# Altium PCB Send_Medicine_Motor.PcbDoc (part 5 of 5)
Units mm, origin at the board's own origin, x right, y up, seen from the top; angles counter-clockwise.
Board outline 150.04 x 100.2 mm, 2 copper layers (Top Layer, Bottom Layer); 273 components, 158 nets, 892 pads, 508 vias.
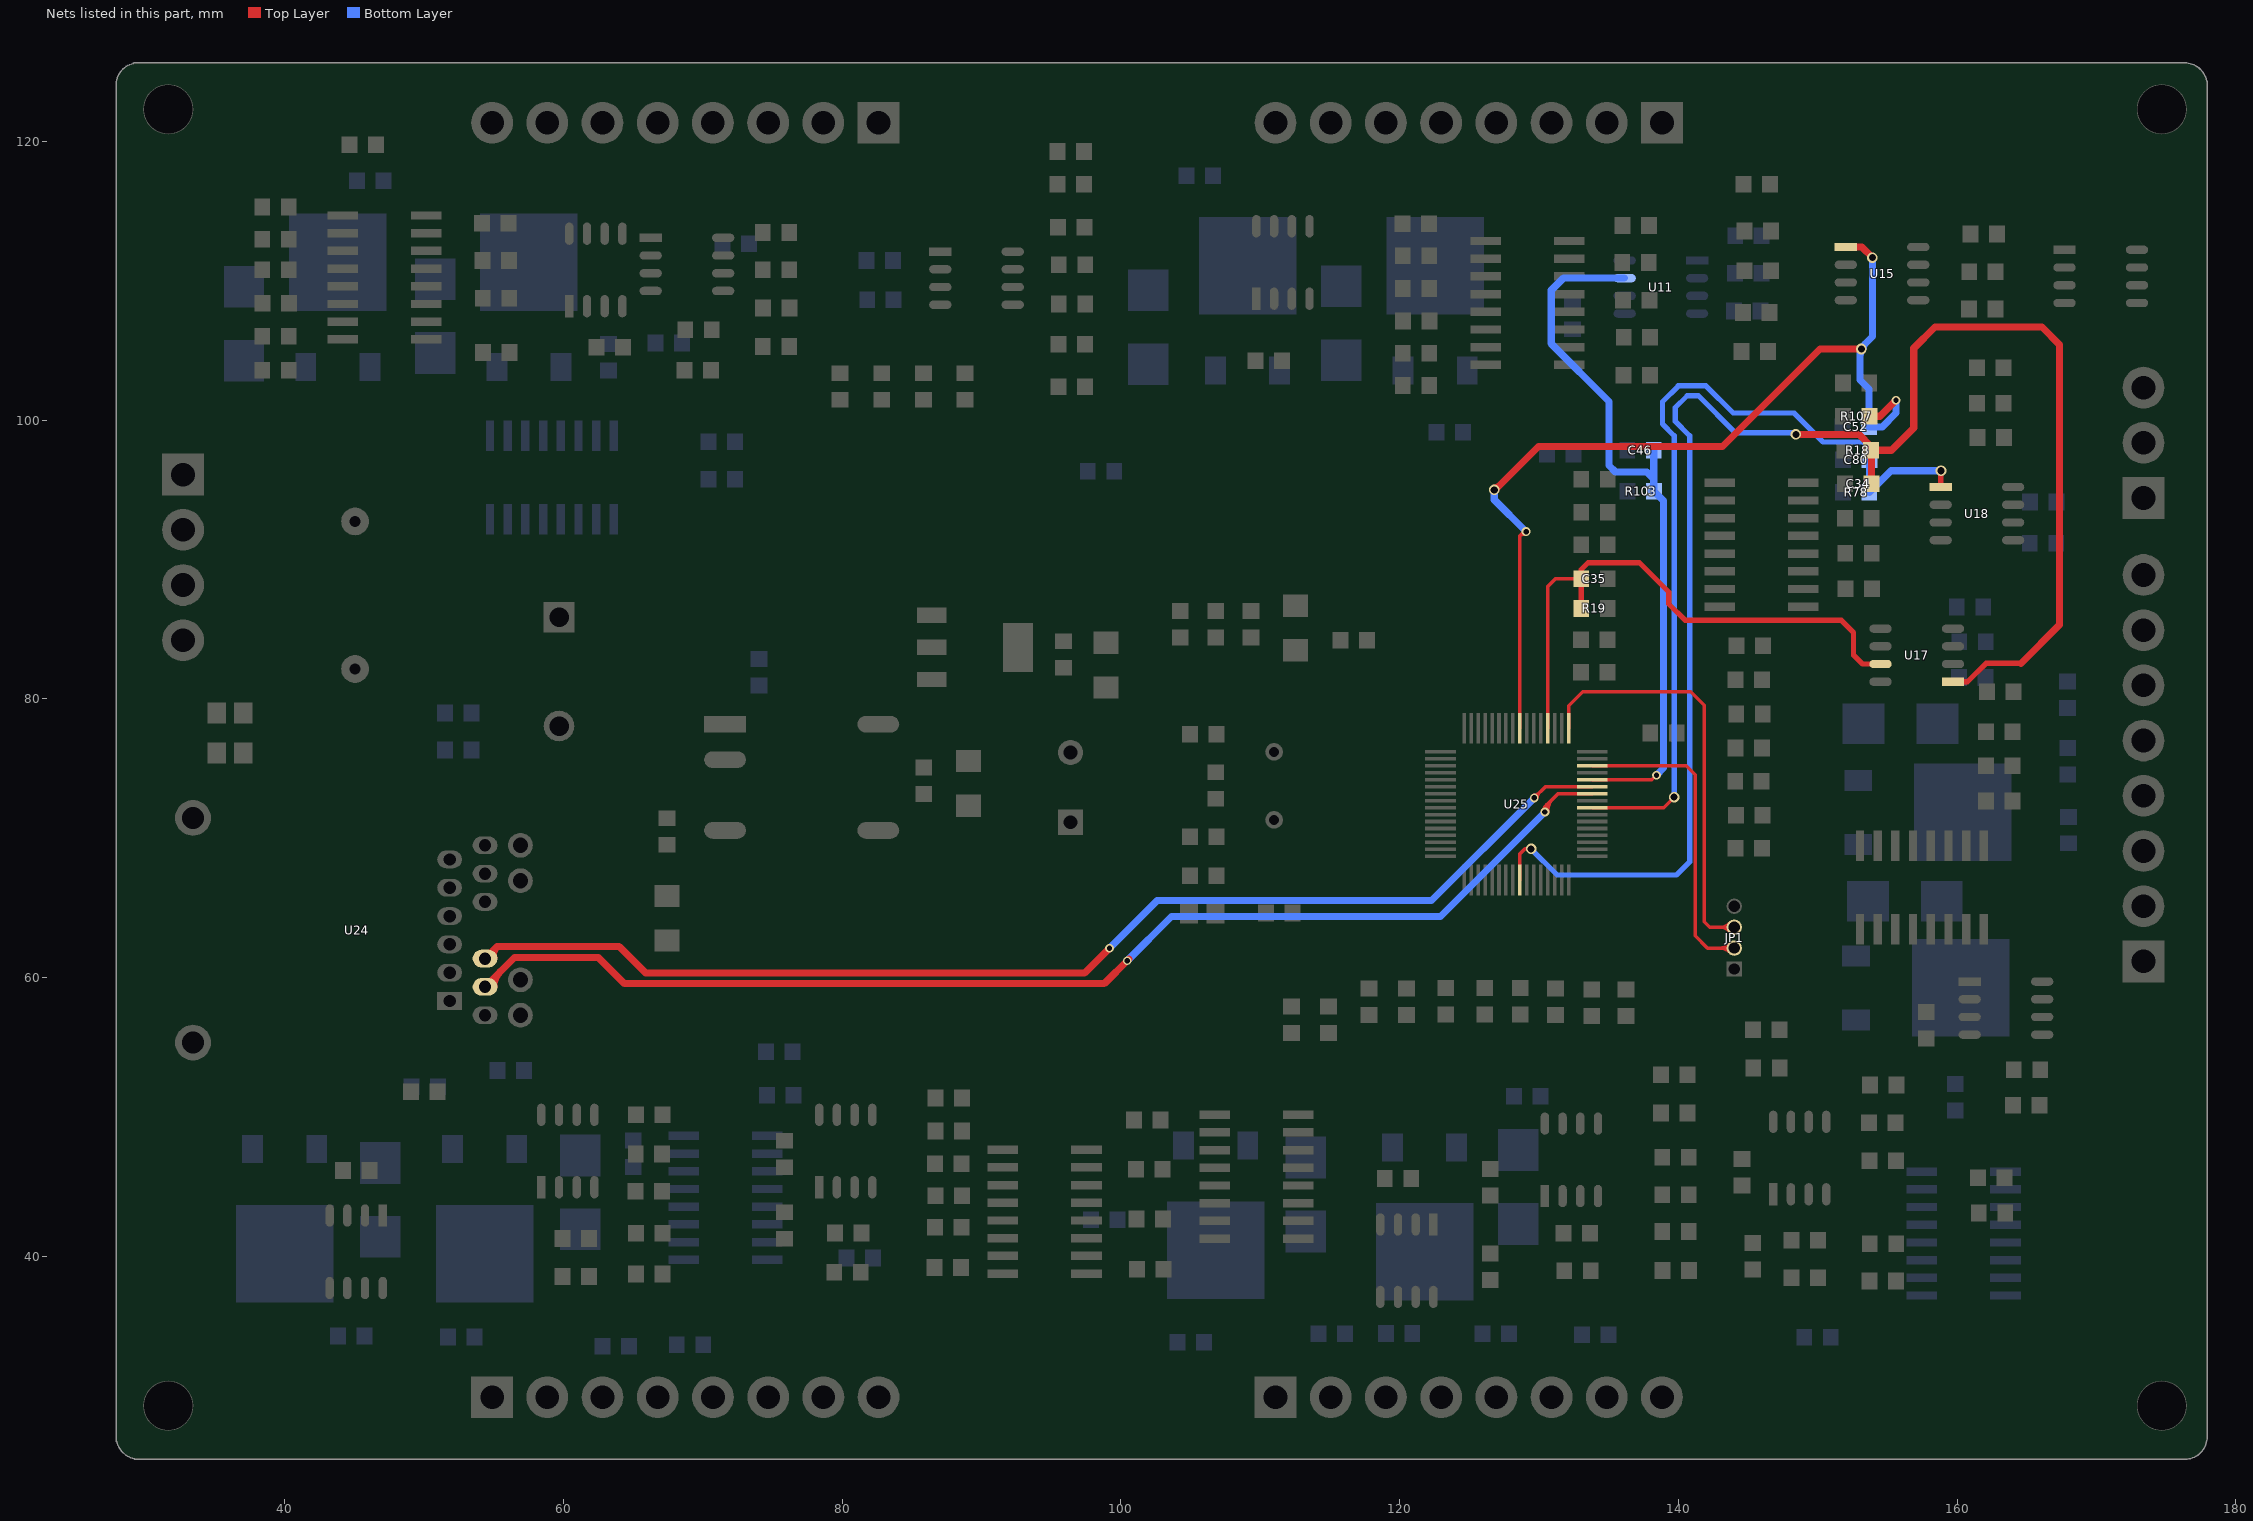
[diagram p5: the nets of this part, all layers, seen from the top]

## Via types
v1: diameter 0.762, hole 0.508, Top Layer to Bottom Layer, 415 vias
v2: diameter 1.27, hole 0.762, Top Layer to Bottom Layer, 47 vias
v3: diameter 0.635, hole 0.381, Top Layer to Bottom Layer, 43 vias
v4: diameter 3.4, hole 3.4, Top Layer to Bottom Layer, 2 vias
v5: diameter 0.6, hole 0.3, Top Layer to Bottom Layer, 1 vias

## Nets (pads, with @x,y where several pads share a name; then routed paths per layer and width w, separated by ;. In a path a pad name is that pad's centre, name@x,y a point inside that pad or via, vN(x,y) a via of type N, cw(c..) or ccw(c..) an arc to the next point about the centre after c; other vN are vias at no path point) (continued)
SOUT42: C46.2 R103.2 U11.7 U25.44 | length 52.1
  Top Layer w0.254: U25.44@133.836,74.2 138.106,74.2 v3(138.43,74.524)
  Bottom Layer w0.508: U11.7@136.151,110.185 131.75,110.185 130.886,109.322 130.886,105.486 135.026,101.346 135.026,96.749 135.509,96.266 137.754,96.266 138.237,95.783 ; C46.2@138.237,97.841 138.237,95.783 ; v3(138.43,74.524) 138.938,75.032 138.938,94.219 R103.2@138.262,94.894 138.237,94.92 138.237,95.783
SOUT43: C52.2 R107.2 U15.1 U25.56 | length 71.2
  Top Layer w0.254: U25.56@128.636,77.9 128.636,91.704 ; v3@129.036,91.814 ccw(c128.932,91.408) 128.636,91.704 ; v3(129.083,91.999) 128.93,91.999 128.636,91.704
  Top Layer w0.508: v1(126.797,94.996) 126.848,94.996 129.972,98.12 143.18,98.12 150.165,105.105 v1(153.137,105.105) ; v1@126.797,95.123 ccw(c126.797,95.552) 127.1,95.249 ; U15.1@152.019,112.42 153.162,112.42 v1(153.924,111.658) ; R107.2@153.731,100.279 154.483,100.279 v3(155.626,101.422)
  Bottom Layer w0.508: v1(126.797,94.996) 126.797,94.285 v3(129.083,91.999) ; 153.035,104.553 cw(c153.688,104.553) v1@153.226,105.015 ; v1@153.264,105.105 cw(c153.815,105.105) 153.425,105.495 ; v1(153.924,111.658) 153.924,105.994 153.035,105.105 153.035,102.87 153.68,102.225 C52.2@153.68,99.517 154.635,99.517 155.626,100.508 v3(155.626,101.422)
SOUT51: C34.2 R18.2 U17.1 U25.25 | length 117.5
  Top Layer w0.254: U25.25@128.636,67 128.636,68.87 129.007,69.24 v1(129.438,69.24)
  Top Layer w0.381: U17.1@159.715,81.229 160.757,81.229 162.077,82.55 164.592,82.55
  Top Layer w0.508: v1(148.438,98.984) 152.959,98.984 153.833,98.11 R18.2@153.833,97.841 ; C34.2@153.858,95.428 153.858,97.815 R18.2@153.833,97.841 ; 164.592,82.55 167.361,85.319 167.361,105.41 166.091,106.68 158.42,106.68 156.896,105.156 156.896,99.441 155.296,97.841 R18.2@153.833,97.841
  Bottom Layer w0.381: v1(129.438,69.24) 131.318,67.361 139.878,67.361 140.818,68.301 140.818,98.882 139.776,99.924 139.776,100.889 140.64,101.752 141.453,101.752 144.12,99.085 148.336,99.085 v1(148.438,98.984)
SOUT52: C35.2 R19.2 U17.7 U25.52 | length 41.7
  Top Layer w0.254: U25.52@130.636,77.9 130.636,88.066 131.191,88.621 C35.2@133.035,88.621
  Top Layer w0.381: R19.2@133.035,86.487 C35.2@133.035,88.621 133.035,89.271 133.528,89.764 137.211,89.764 139.319,87.655 139.319,86.817 140.487,85.649 151.689,85.649 152.578,84.76 152.578,83.134 153.213,82.499 U17.7@154.515,82.499
SOUT53: C80.2 R78.2 U18.1 U25.40 | length 62.3
  Top Layer w0.254: U25.40@133.836,72.2 138.951,72.2 v1(139.7,72.949) v1@139.751,73
  Top Layer w0.381: U18.1@158.826,95.199 158.826,96.342 v1(158.852,96.368)
  Bottom Layer w0.381: v1(139.7,72.949) 139.7,98.882 138.862,99.72 138.862,101.321 140.005,102.464 141.986,102.464 143.942,100.508 148.311,100.508 150.393,98.425 153.264,98.425 153.731,97.958 C80.2@153.731,97.155
  Bottom Layer w0.508: C80.2@153.706,97.155 R78.2@153.706,94.818 155.255,96.368 v1(158.852,96.368)
TCK/SWCLK: JP1.3 U25.49 | length 31.6
  Top Layer w0.254: U25.49@132.136,77.9 132.136,79.507 133.147,80.518 140.894,80.518 141.859,79.553 141.859,64.008 142.252,63.615 JP1.3@144.018,63.615 ; JP1.3@143.719,63.316 ccw(c142.997,62.594) 142.997,63.615 ccw(c142.997,64.636) JP1.3@143.719,63.914
TMS/SWDIO: JP1.2 U25.46 | length 24
  Top Layer w0.254: U25.46@133.836,75.2 140.573,75.2 141.224,74.549 141.224,62.992 142.101,62.115 JP1.2@144.018,62.115 ; JP1.2@143.719,61.816 ccw(c142.997,61.094) 142.997,62.115 ccw(c142.997,63.136) JP1.2@143.719,62.414
USAR1_RXD: U24.9 U25.43 | length 87.7
  Top Layer w0.254: v3(129.667,72.898) 130.469,73.7 U25.43@133.836,73.7 ; v3@129.667,73.088 ccw(c129.667,73.548) 129.992,73.223 ccw(c130.317,72.898) v3@129.857,72.898
  Top Layer w0.508: U24.9@54.381,61.366 55.245,62.23 ; U24.9@55.009,61.443 cw(c55.858,61.617) 55.245,62.23 ; v3(99.187,62.103) 97.409,60.325 65.913,60.325 64.008,62.23 55.245,62.23
  Bottom Layer w0.508: v3(99.187,62.103) 102.616,65.532 122.301,65.532 v3(129.667,72.898)
USAR1_TXD: U24.8 U25.42 | length 90.6
  Top Layer w0.254: v3@130.315,72.034 ccw(c130.143,72.263) 130.429,72.263 ; v3@130.365,71.882 cw(c131.132,71.882) 130.59,72.424 ; v3(130.429,71.882) 130.429,72.263 ; v3@130.543,72.034 cw(c130.715,72.263) 130.429,72.263 ; v3@130.619,71.882 cw(c131.999,71.882) 131.024,72.858 ; U25.42@133.836,73.2 131.366,73.2 130.429,72.263
  Top Layer w0.508: U24.8@54.381,59.334 56.49,61.443 62.509,61.443 64.389,59.563 98.806,59.563 v3@100.584,61.341 ; U24.8@55.016,59.334 cw(c56.549,59.334) 55.465,60.418
  Bottom Layer w0.508: v3(100.457,61.214) 103.632,64.389 122.936,64.389 v3(130.429,71.882)
pads on no net: Pad1.1 Pad2.1 Pad3.1 Pad4.1 U21.8 U24.1 U24.2 U24.3 U24.5 U24.6 U24.17 U25.1 U25.2 U25.3 U25.4 U25.14 U25.17 U25.20 U25.45 U25.50 U25.59 U25.61 U25.62
copper on no net: | length 0.8
  Top Layer w0.508: 65.913,46.101 66.675,46.101
  other v2: 102.311,60.3 104.013,62.052
  other v4: 36.601,57.048 36.601,69.748

## Polygon pours and split planes (outlines as drawn)
24V0 on Top Layer "Top Layer-No Net" (hatched 90Degree grid 0.508 track 0.305, remove dead copper, pour order 5): 28.296,74.701 28.296,112.954 29.032,112.954 36.703,120.625 41.605,125.527 41.859,125.527 163.83,125.527 171.171,118.186 177.317,112.039 177.317,107.34 177.317,39.421 173.609,35.712 163.855,25.959 163.855,25.679 42.418,25.679 40.691,27.407 39.065,29.032 39.065,37.16 39.065,41.224 47.752,49.911 49.479,51.638 153.187,51.638 153.187,102.718 150.571,105.334 147.422,102.184 78.308,102.184 78.308,80.289 74.422,76.403 73.254,75.235 28.118,75.235
GND on Top Layer "Top Layer-No Net" (hatched 90Degree grid 0.508 track 0.305, remove dead copper, pour order 6): 28.702,74.016 73.772,74.016 76.972,77.216 81.001,81.244 81.001,113.767 163.369,113.767 164.359,112.776 165.379,111.756 165.379,37.897 28.448,37.897 28.346,37.998 28.118,38.227 28.118,71.831
24V0 on Bottom Layer "Top Layer-No Net" (hatched 90Degree grid 0.508 track 0.305, remove dead copper, pour order 7): 28.296,75.768 28.296,113.386 28.397,113.487 27.864,112.954 27.864,112.497 28.677,112.497 33.909,117.729 41.427,125.247 43.942,125.247 163.576,125.247 165.202,123.622 177.063,111.76 177.063,110.693 177.063,39.243 177.419,38.887 164.846,26.314 164.389,26.314 42.418,26.314 41.961,26.772 39.167,29.566 39.167,41.224 39.243,41.224 49.733,51.714 49.809,51.638 152.552,51.638 152.552,102.083 153.365,102.895 152.375,101.905 78.41,101.905 78.41,79.68 76.505,77.775 73.685,74.955 27.94,74.955
GND on Bottom Layer "Top Layer-No Net" (hatched 90Degree grid 0.508 track 0.305, remove dead copper, pour order 8): 28.473,73.33 72.644,73.33 73.33,74.016 79.858,80.543 80.772,80.543 80.772,112.522 81.712,113.462 81.813,113.36 165.557,113.36 165.557,38.659 164.668,37.77 164.084,38.354 27.762,38.354 27.762,75.108 27.203,75.667

## Keep-outs
Keep-Out Layer:
  lines w0.2: 28.002,124.145 cw(c29.5,124.029) 29.616,125.527 ; 28.01,26.787 28.01,124.247 ; 28.031,27.166 ccw(c29.529,27.05) 29.413,25.552 ; 29.21,125.527 176.456,125.527 cw(c176.34,124.029) 177.838,123.913 ; 29.286,25.539 35.139,25.539 176.403,25.539 ; 176.224,25.539 ccw(c176.34,27.037) 177.838,26.921 177.838,124.282

## Silkscreen, mask and mechanical layers (free items; w line width, h text height)
Top Overlay:
  lines w0.254: 145.364,59.182 145.415,59.233 145.415,66.615
  text "M4" at 138.303,115.824 h0.8
  text "+24V" at 56.921,115.799 h0.8
  text "S43" at 118.212,115.799 h0.8
  text "LG4" at 133.934,115.799 h0.8
  text "24V0" at 53.264,115.773 h0.8
  text "M3" at 81.712,115.773 h0.8
  text "S42" at 121.539,115.773 h0.8
  text "S31" at 69.52,115.748 h0.8
  text "K3" at 73.457,115.748 h0.8
  text "LG3" at 77.191,115.748 h0.8
  text "+24V" at 114.452,115.748 h0.8
  text "S41" at 125.705,115.722 h0.8
  text "S32" at 65.456,115.697 h0.8
  text "S33" at 61.392,115.672 h0.8
  text "24V0" at 109.855,115.646 h0.8
  text "K4" at 129.718,115.646 h0.8
  text "24V_IN" at 165.532,100.203 h0.8 r45
  text "24V0" at 165.608,97.892 h0.8
  text "24V_IN" at 38.354,95.275 h0.8 r45
  text "RUN" at 165.583,93.955 h0.8
  text "24V0" at 38.252,91.008 h0.8 r45
  text "24V0" at 165.481,88.494 h0.8
  text "24V_IN" at 38.278,86.639 h0.8 r45
  text "+24V" at 165.456,84.963 h0.8
  text "24V0" at 38.329,83.033 h0.8 r45
  text "S53" at 166.014,80.594 h0.8
  text "S52" at 166.167,75.946 h0.8
  text "S51" at 166.192,72.238 h0.8
  text "K5" at 166.345,68.224 h0.8
  text "GND" at 140.005,64.745 h0.8
  text "LG5" at 166.395,64.44 h0.8
  text "SCLK" at 139.319,63.348 h0.8
  text "SDIO" at 139.37,61.671 h0.8
  text "M5" at 166.421,60.782 h0.8
  text "+3V3" at 139.268,60.223 h0.8
  text "+24V" at 77.114,35.001 h0.8
  text "K1" at 62.408,34.976 h0.8
  text "S12" at 70.028,34.976 h0.8
  text "S11" at 64.872,34.95 h0.8
  text "S13" at 73,34.95 h0.8
  text "24V0" at 81.509,34.925 h0.8
  text "LG1" at 58.064,34.874 h0.8
  text "LG2" at 114.325,34.874 h0.8
  text "K2" at 118.618,34.823 h0.8
  text "+24V" at 133.401,34.823 h0.8
  text "M1" at 54.839,34.798 h0.8
  text "24V0" at 137.414,34.798 h0.8
  text "M2" at 110.211,34.773 h0.8
  text "S23" at 129.921,34.773 h0.8
  text "S21" at 122.377,34.722 h0.8
  text "S22" at 125.552,34.722 h0.8
Bottom Overlay:
  text "Willach Heise" at 92.862,58.725 h0.8
  text "Send_Mendicine_Device V1.0" at 92.939,57.252 h0.8
  text "2017-5-9" at 92.939,55.728 h0.8

## Text inside footprints (layer, text, board x,y; h text height)
C14: Top Overlay "+" at 89.84,69.418 h0.8 r90
C16: Top Overlay "+" at 98.171,86.944 h0.8 r270
C20: Top Overlay "+" at 111.76,89.611 h1.5 r270
C22: Top Overlay "+" at 65.024,66.675 h0.8 r270
Q1: Bottom Overlay "G" at 125.095,100.85 h0.8; Bottom Overlay "D" at 122.809,100.85 h0.8; Bottom Overlay "S" at 120.523,100.85 h0.8
Q2: Bottom Overlay "G" at 37.465,50.407 h0.8 r180; Bottom Overlay "D" at 39.751,50.407 h0.8 r180; Bottom Overlay "S" at 42.037,50.407 h0.8 r180
Q3: Bottom Overlay "G" at 104.267,50.661 h0.8 r180; Bottom Overlay "D" at 106.553,50.661 h0.8 r180; Bottom Overlay "S" at 108.839,50.661 h0.8 r180
Q4: Bottom Overlay "G" at 60.071,101.104 h0.8; Bottom Overlay "D" at 57.785,101.104 h0.8; Bottom Overlay "S" at 55.499,101.104 h0.8
Q5: Bottom Overlay "G" at 111.633,100.85 h0.8; Bottom Overlay "D" at 109.347,100.85 h0.8; Bottom Overlay "S" at 107.061,100.85 h0.8
Q6: Bottom Overlay "G" at 51.816,50.407 h0.8 r180; Bottom Overlay "D" at 54.102,50.407 h0.8 r180; Bottom Overlay "S" at 56.388,50.407 h0.8 r180
Q7: Bottom Overlay "G" at 119.253,50.534 h0.8 r180; Bottom Overlay "D" at 121.539,50.534 h0.8 r180; Bottom Overlay "S" at 123.825,50.534 h0.8 r180
Q8: Bottom Overlay "G" at 46.355,101.104 h0.8; Bottom Overlay "D" at 44.069,101.104 h0.8; Bottom Overlay "S" at 41.783,101.104 h0.8
Q9: Bottom Overlay "G" at 150.05,56.718 h0.8 r270; Bottom Overlay "D" at 150.05,59.004 h0.8 r270; Bottom Overlay "S" at 150.05,61.29 h0.8 r270
Q10: Bottom Overlay "G" at 150.202,69.317 h0.8 r270; Bottom Overlay "D" at 150.202,71.603 h0.8 r270; Bottom Overlay "S" at 150.202,73.889 h0.8 r270